# Altium PCB PCB_m5.PcbDoc
Units mil, origin at the board's own origin, x right, y up, seen from the top; angles counter-clockwise.
Board outline 1605.03 x 940.03 mil, 2 copper layers (Top Layer, Bottom Layer); 4 components, 3 nets, 10 pads, 0 vias.
Unrouted connection lines stored in the file: 2.
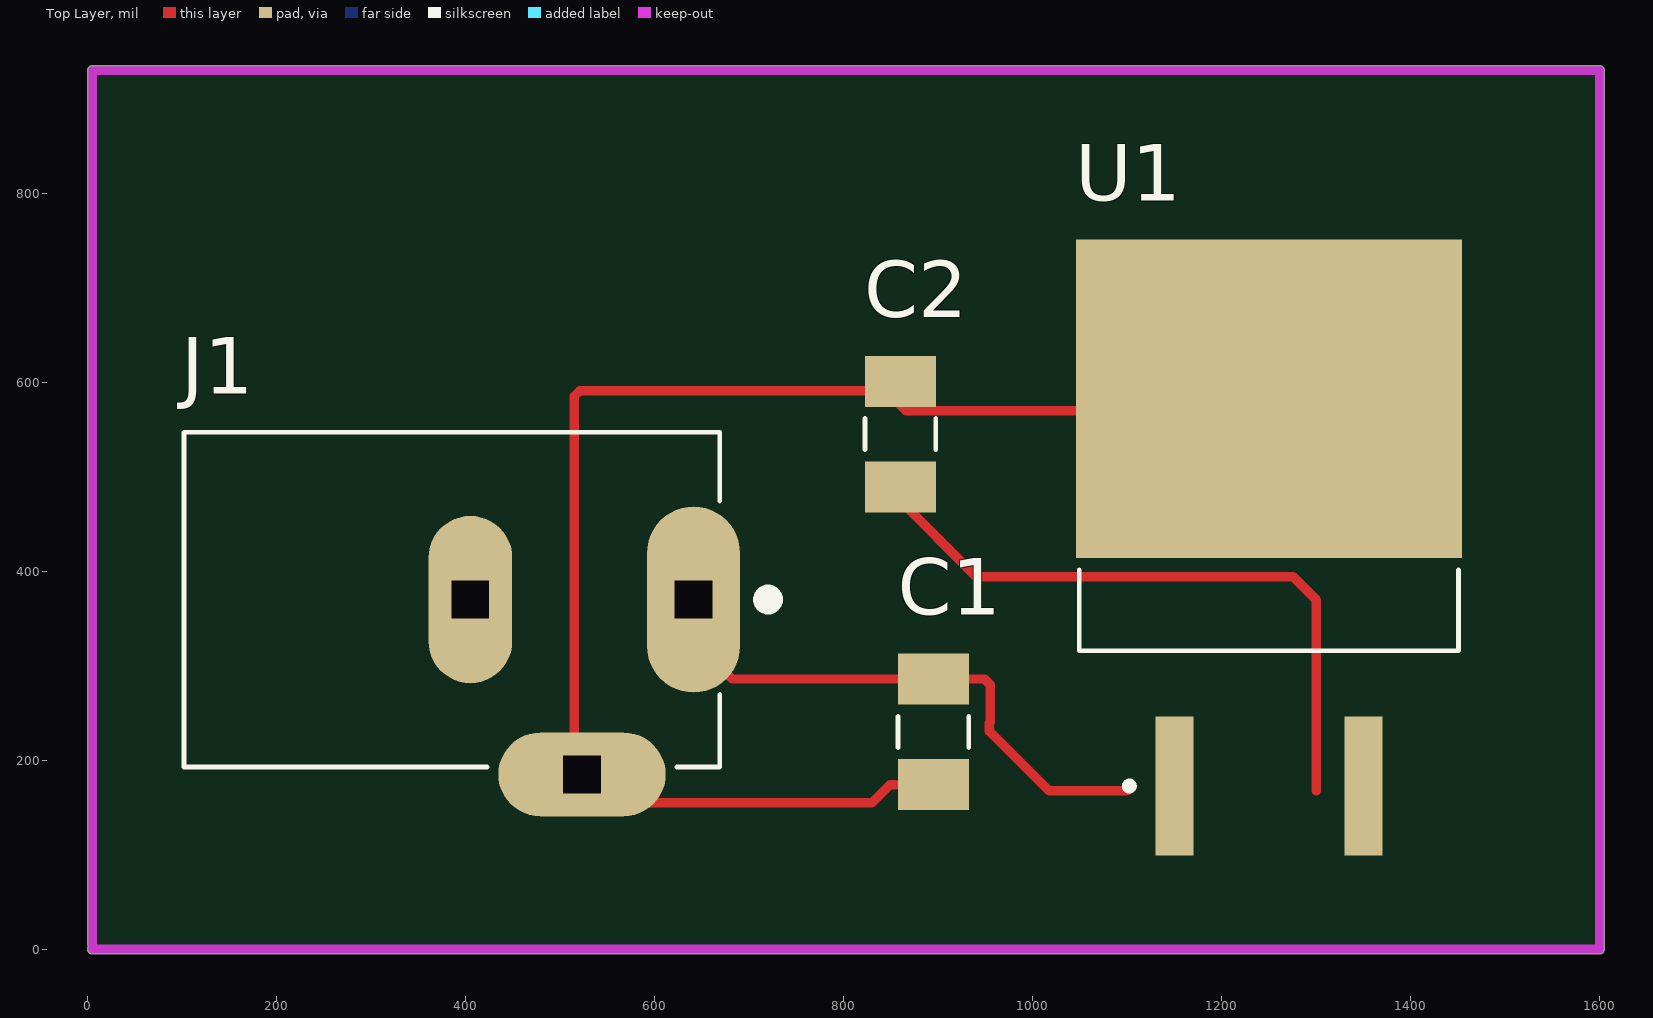
[diagram p0: Top Layer view]
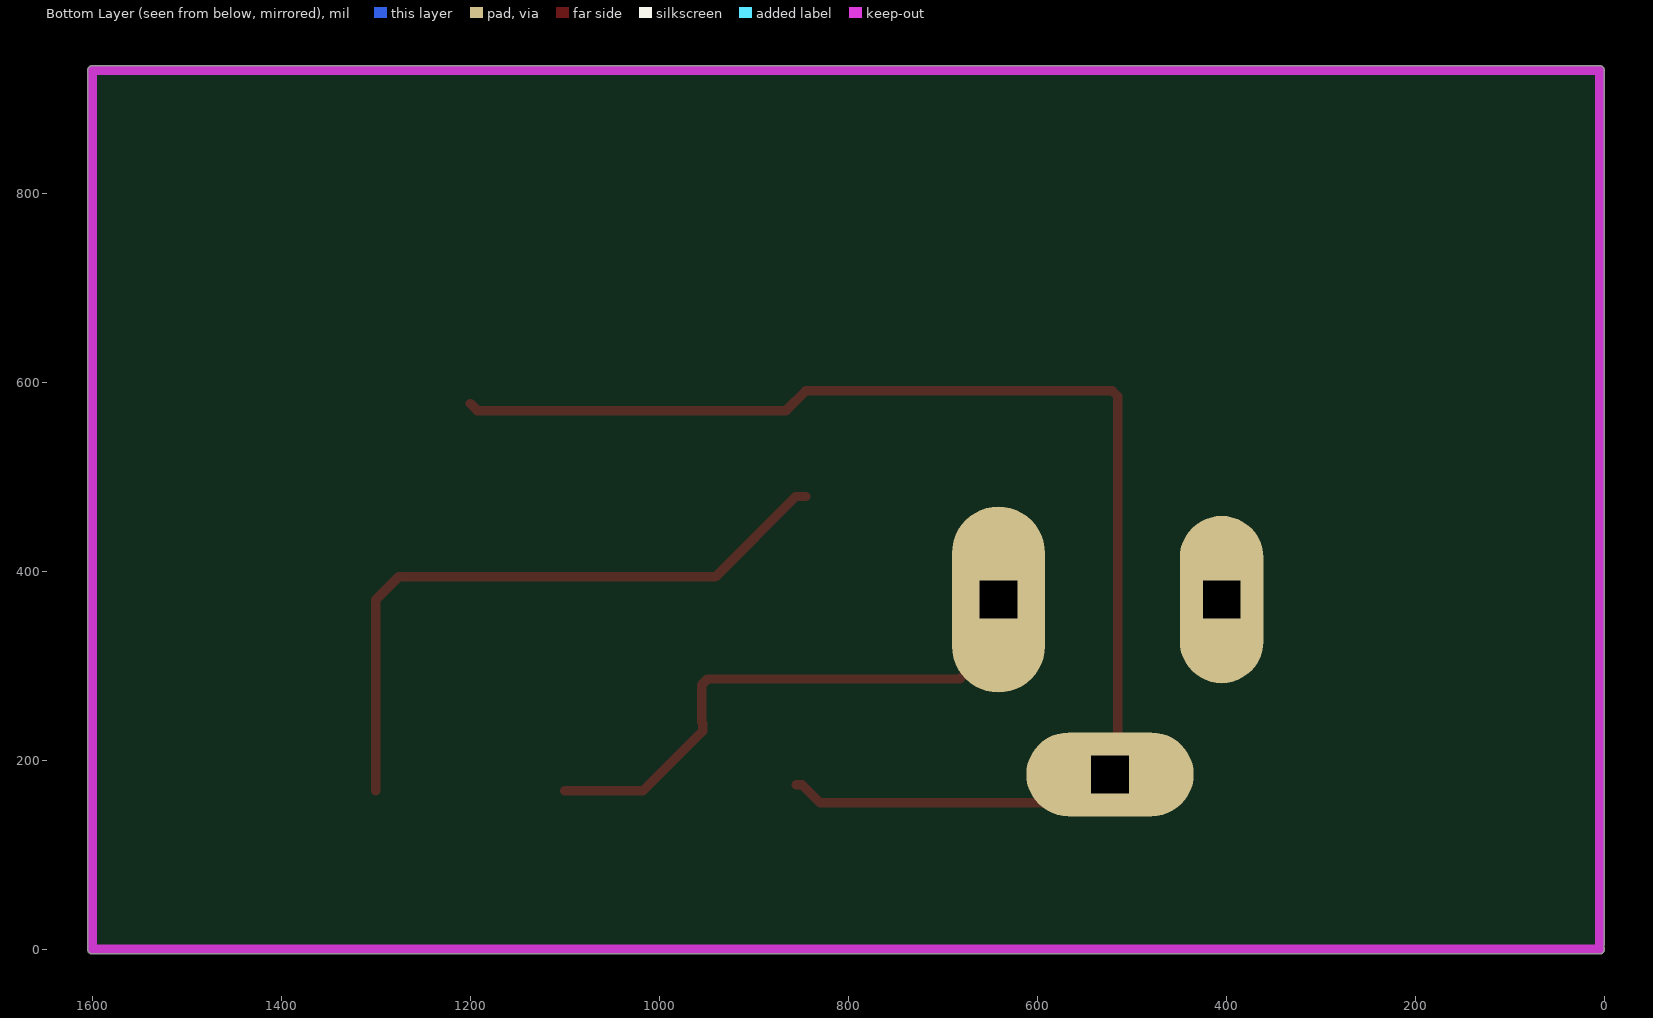
[diagram p1: Bottom Layer view, seen from below]
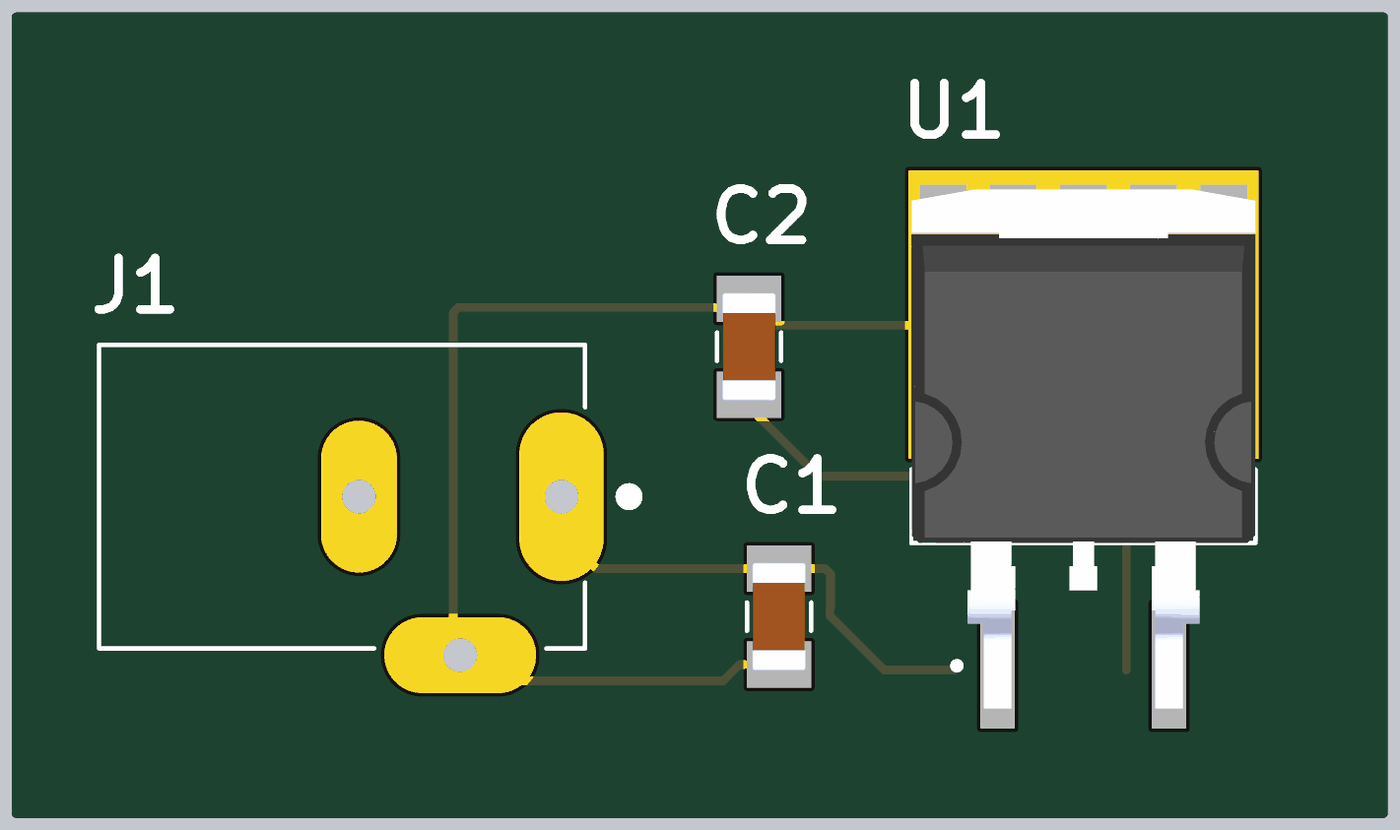
[diagram p2: 3D render of the assembled board from above, using the file's embedded part models]

## Layer stack, top to bottom
Top Solder: solder mask 0.4, Solder Resist, Dk 3.5
Top Layer: signal copper 1.4
Dielectric 1: dielectric 12.6, FR-4, Dk 4.8
Bottom Layer: signal copper 1.4
Bottom Solder: solder mask 0.4, Solder Resist, Dk 3.5

## Board outline
5,-5.02 cw(c5,0) 0.65,2.5 -0.01,5 -0.01,930 cw(c5,930) 5,935.02 1600,935.02 cw(c1600,930) 1605.01,930 1605.01,0 cw(c1600,0) 1600,-5.01

## Design rules (kind name [scope] priority, off if disabled: settings)
Clearance [All] p1: gap=10 ignorepadtopadclearanceinfootprint=FALSE except(0: Arc-Hole Track-Hole SMDPad-Hole THPad-Hole Via-Hole Fill-Hole Poly-Hole Region-Hole Text-Hole)
PolygonConnect [All] p1: connectstyle=Relief reliefconductorwidth=10 reliefentries=4 polygonreliefangle="90 Angle" airgapwidth=10
RoutingVias [All] p1: holewidth=28 width=50 viastyle="Through Hole" minholewidth=28 minwidth=50 maxholewidth=28 maxwidth=50
SolderMaskExpansion [All] p1: expansion=4 istentingtop=FALSE
Width [All] p1: maxlimit=10 minlimit=10 preferedwidth=10
30 further rules are at their usual default settings.

## Components (designator, comment, footprint, x,y, rotation, side; value= is the part's Value field where it differs from the comment)
C1 "0.33µF" CAPC3216X190N 895,230 r270 top
C2 "0.1µF" CAPC3216X190N 860,545 r90 top
J1 "PJ-002AH" CUI_PJ-002AH 641.22,370 r180 top
U1 "7805CD2T" TO254P1542X460-3N 1250,425 r90 top

## Footprints (in the part's own frame and the unit in brackets; to place one, negate y for a bottom-side part, rotate by r counter-clockwise, add the part's x,y. Pads: shape width x height; smd on the part's side, far side on the other; paste and mask are expansions set on the pad)
CAPC3216X190N [mm]
  rect 1.37x1.91 smd: 1(-1.421,0) 2(1.421,0)
  silkscreen extent -0.42,-0.95 0.42,0.95, body extent -1.6,-0.8 1.6,0.8, height 1.9
CUI_PJ-002AH [mm]
  oval 2.5x5 hole 1 square: 1(0,0)
  oval 2.25x4.5 hole 1 square: 2(6,0)
  oval 4.5x2.25 hole 1 square: 3(3,4.7)
  silkscreen extent -2.2,-4.5 13.7,4.5
TO254P1542X460-3N [mm]
  rect 3.74x1.02 smd: 1(-6.41,2.54) 2(-6.41,-2.54)
  rect 8.56x10.37 smd paste-6: 3(4,0)
  silkscreen extent -6.51,-5.1 -0.59,5.1, body extent -7.71,-5.1 7.71,5.1, height 4.6

## Part data
C1 C2: library part GRM31CR60J227ME11L, "SMD Multilayer Ceramic Capacitor, GRM Series, 220 F, 20%, X5R, 6.3 V, 1206 [3216 Metric]", Package="3216 Murata", Check_prices=https://www.snapeda.com/parts/GRM31CR60J227ME11L/Murata%20Electronics%20North%20America/view-part/1756709/?ref=eda, Digi-Key_Part_Number=490-13970-1-ND, MF="Murata Electronics", MP=GRM31CR60J227ME11L, Purchase-URL=https://pricing.snapeda.com/search/part/GRM31CR60J227ME11L/?ref=eda, SnapEDA_Link=https://www.snapeda.com/parts/GRM31CR60J227ME11L/Murata%20Electronics%20North%20America/view-part/1756709/?ref=snap
J1: "2.0 x 6.5 mm, 5.0 A, Horizontal, Through Hole, Dc Power Jack Connector", Package=None, Availability="In Stock", Check_prices=https://www.snapeda.com/parts/PJ-002AH/CUI+Devices/view-part/?ref=eda, CUI_purchase_URL=https://www.cuidevices.com/product/interconnect/connectors/dc-power-connectors/jacks/pj-002ah?utm_source=snapeda.com&utm_medium=referral&utm_campaign=snapedaBOM, MF="CUI Devices", MP=PJ-002AH, Price=None, Purchase-URL=https://pricing.snapeda.com/search/part/PJ-002AH/?ref=eda, SnapEDA_Link=https://www.snapeda.com/parts/PJ-002AH/CUI+Devices/view-part/?ref=snap
U1: "Linear Voltage Regulator IC Positive Fixed 1 Output 1.5A D2PAK", Package="D2PAK STMicroelectronics", Check_prices=https://www.snapeda.com/parts/7805CD2T/STMicroelectronics/view-part/?ref=eda, MF=STMicroelectronics, MP=7805CD2T, SnapEDA_Link=https://www.snapeda.com/parts/7805CD2T/STMicroelectronics/view-part/?ref=snap

## Nets (pads, with @x,y where several pads share a name; then routed paths per layer and width w, separated by ;. In a path a pad name is that pad's centre, name@x,y a point inside that pad or via, vN(x,y) a via of type N, cw(c..) or ccw(c..) an arc to the next point about the centre after c; other vN are vias at no path point)
+5: C2.1 U1.2 | length 702.5
  Top Layer w10: C2.1@845,479.06 855.63,479.06 940.71,393.98 1276.02,393.98 1300,370 1300,167.64
GND: C1.2 C2.2 J1.3 U1.3 | length 1472.5
  Top Layer w10: 855,174.06 849.06,174.06 829.96,154.96 523.11,154.96 515,163.07 515,585.09 520.86,590.94 845,590.94 865.94,570 1192.52,570 U1.3@1200,577.48
NetC1_1: C1.1 J1.1 U1.1 | length 568
  Top Layer w10: J1.1@641.22,340 641.22,326.79 682.07,285.94 855,285.94 949.14,285.94 955,280.09 955,240 954.14,239.14 954.14,230.86 1017.36,167.64 1100,167.64
pads on no net: J1.2

## Keep-outs
Keep-Out Layer:
  lines w10: 5,0 1600,0 1600,925 ; 5,5 5,930 1600,930